# Altium PCB Power Divider.PcbDoc
Units mil, origin at the board's own origin, x right, y up, seen from the top; angles counter-clockwise.
Board outline 1900.95 x 2020.4 mil, 2 copper layers (Top Layer, Bottom Layer); 4 components, 0 nets, 17 pads, 0 vias.
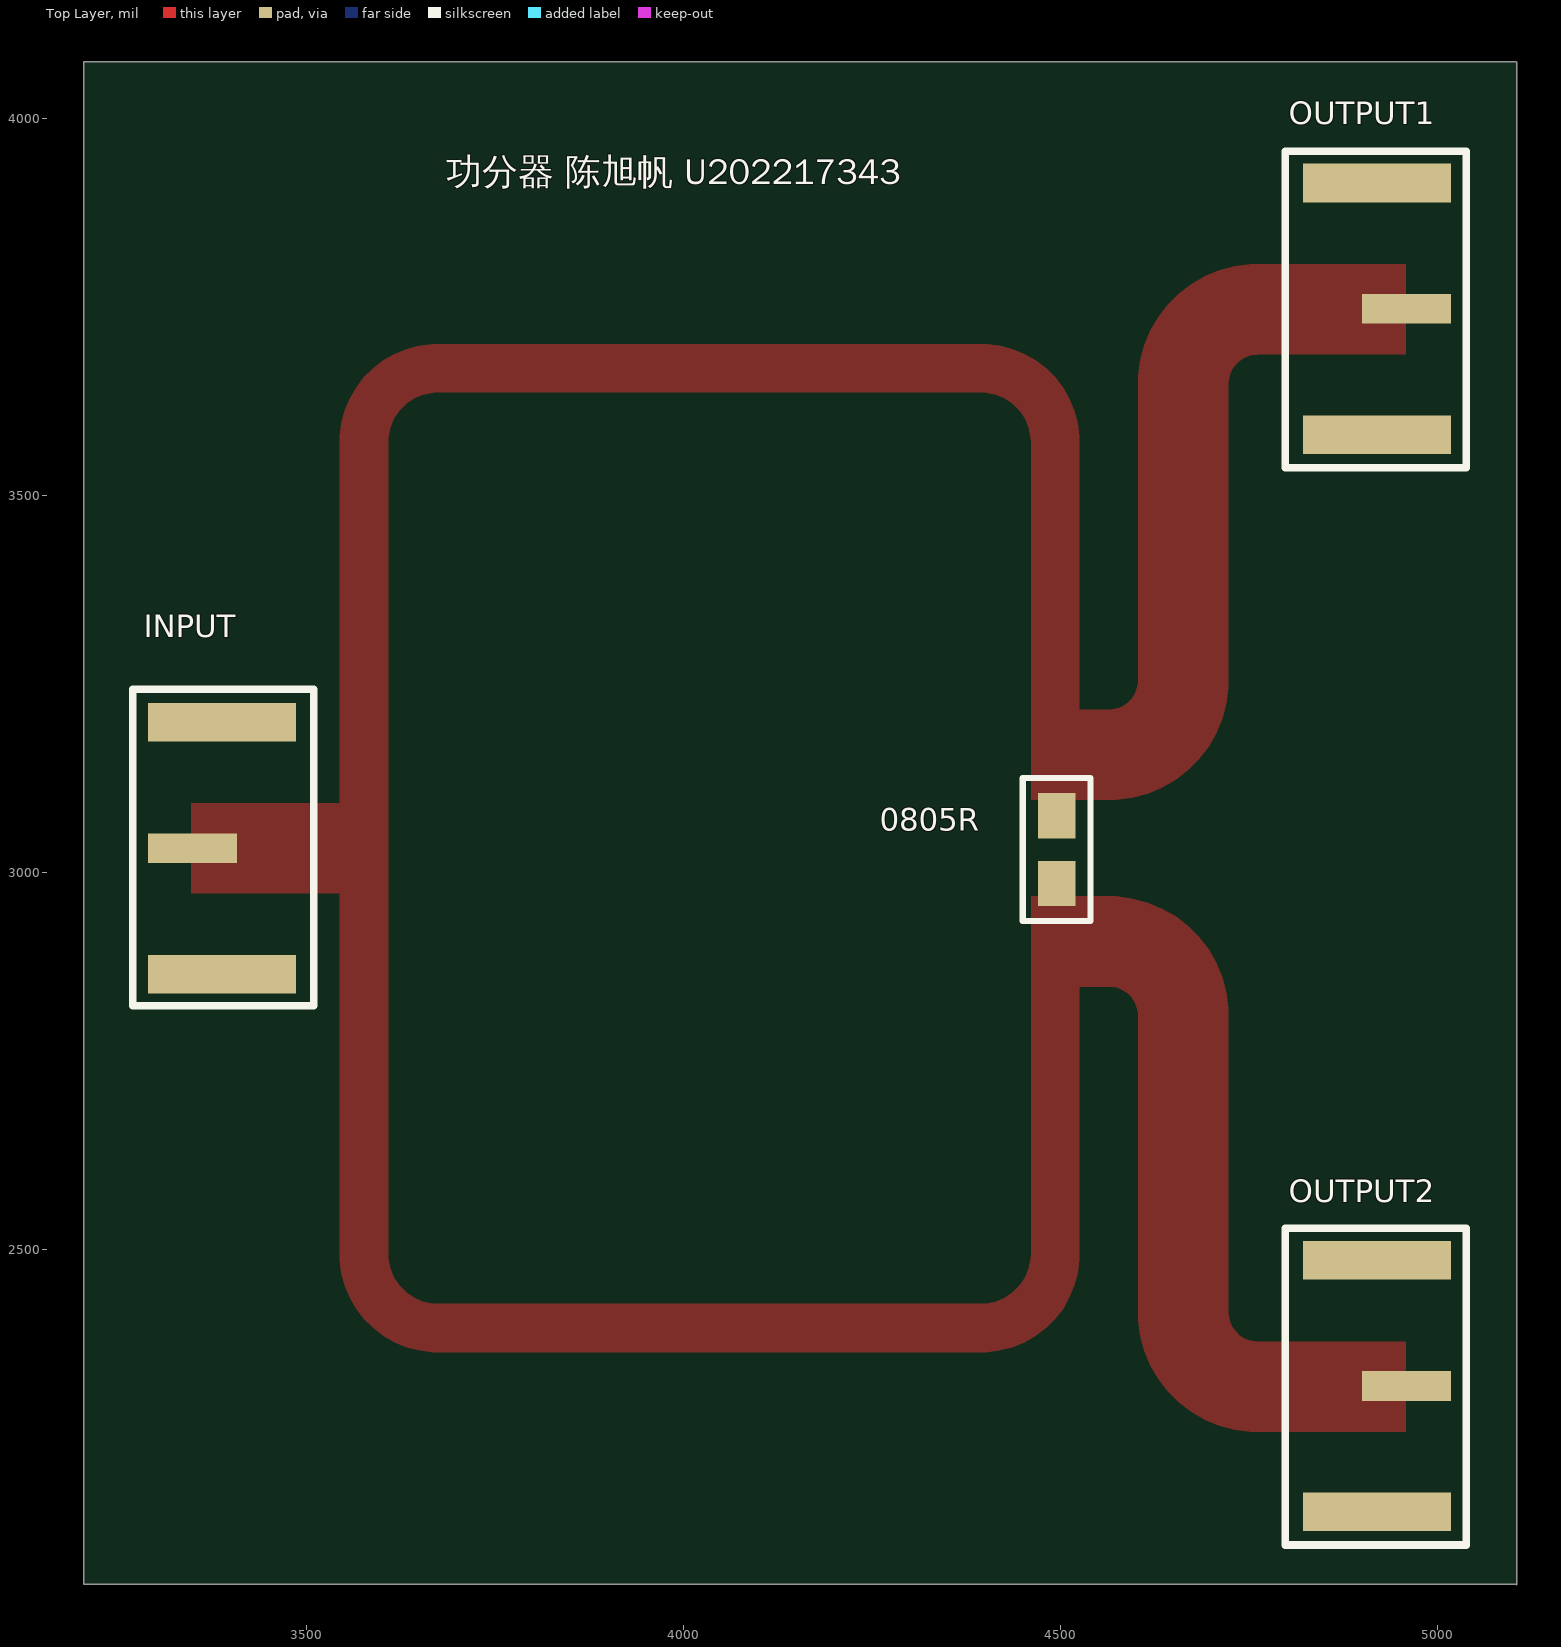
[diagram p0: Top Layer view]
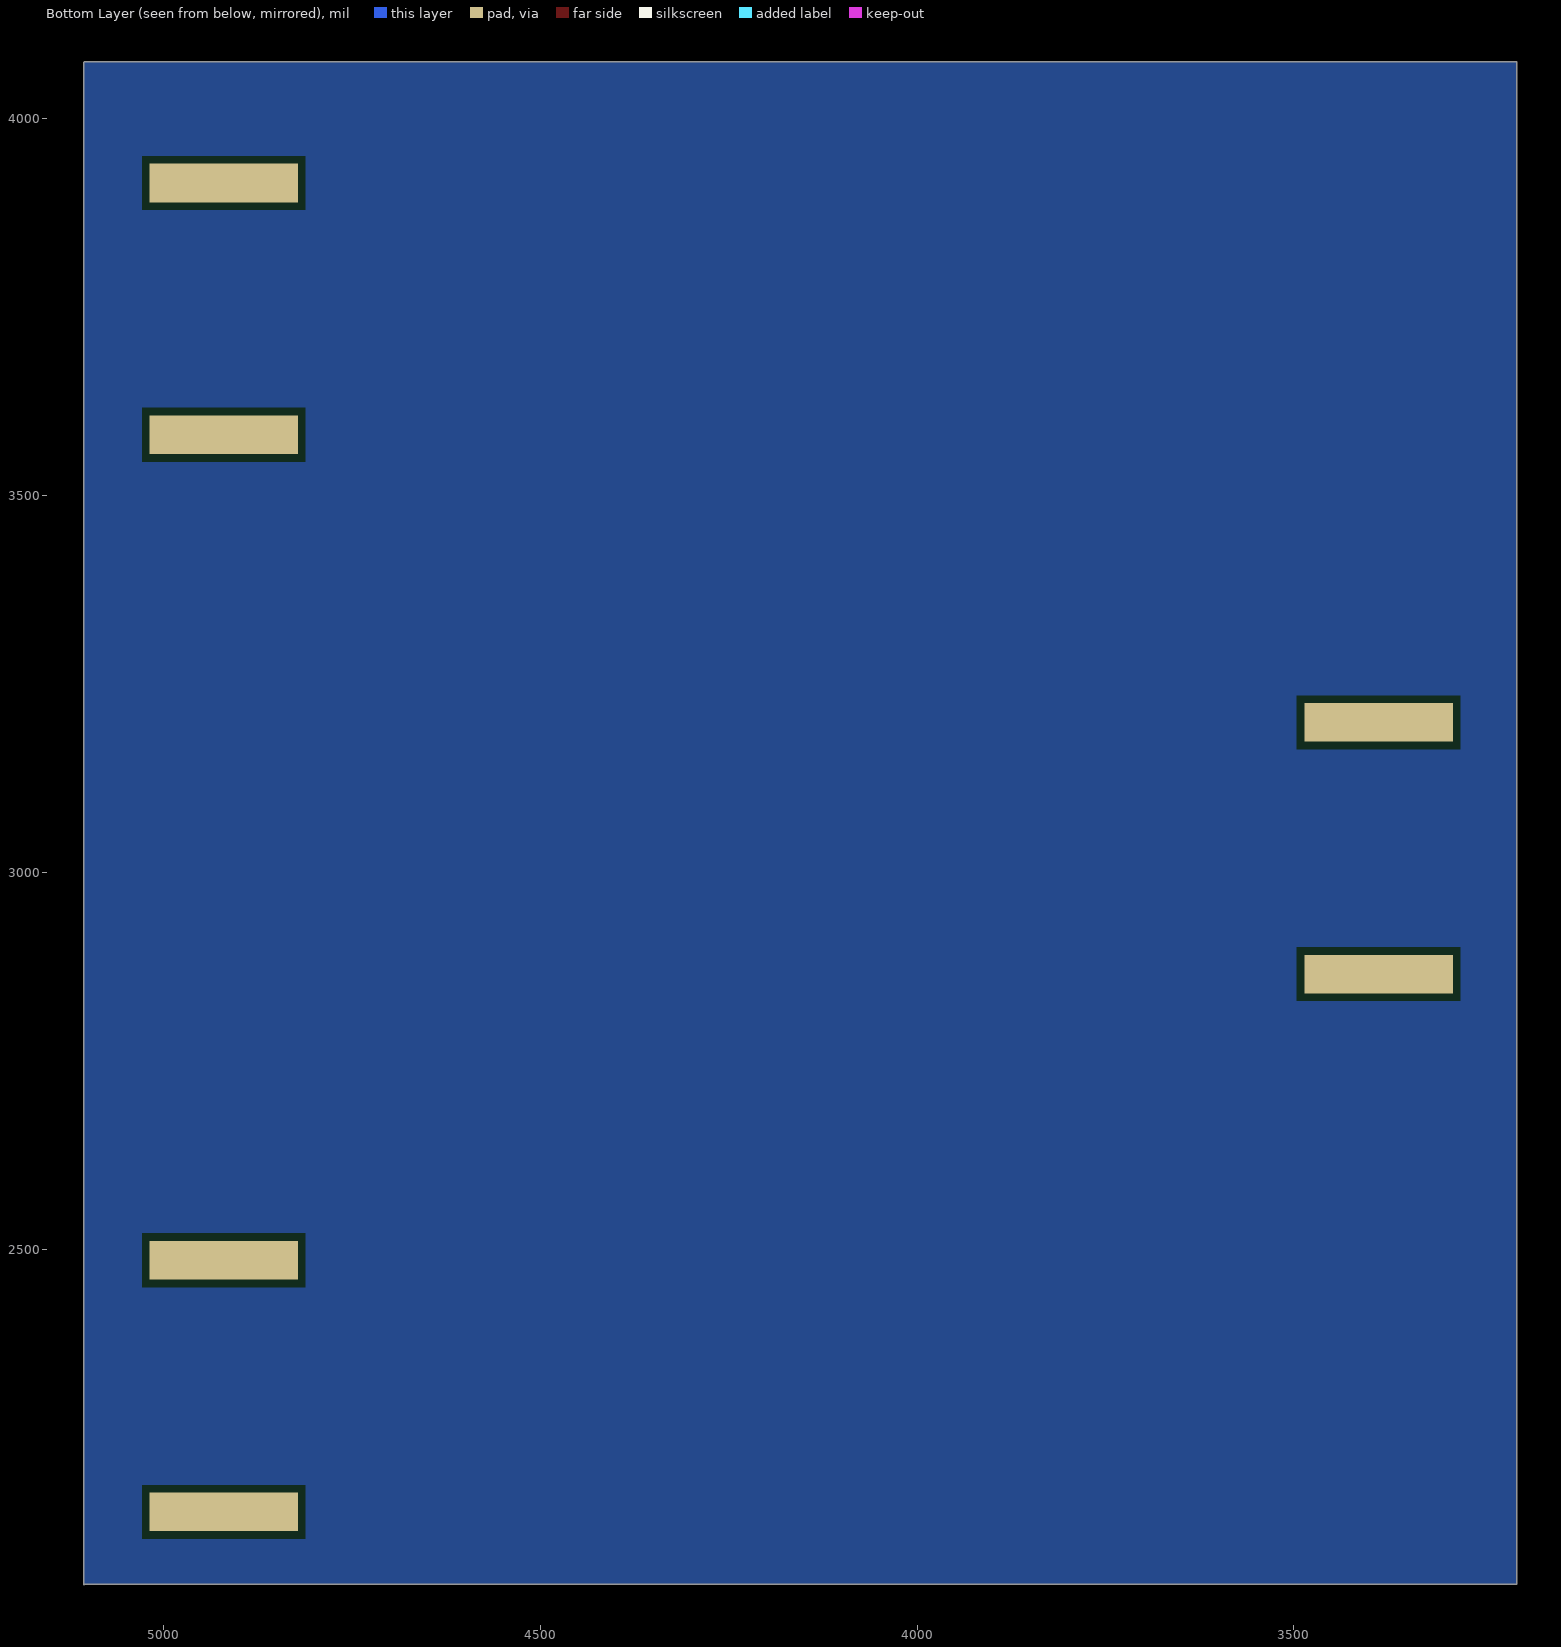
[diagram p1: Bottom Layer view, seen from below]

## Layer stack, top to bottom
Top Solder: solder mask 0.4, Solder Resist, Dk 3.5
Top Layer: signal copper 1.4
Dielectric 1: dielectric 12.6, FR-4, Dk 4.8
Bottom Layer: signal copper 1.4
Bottom Solder: solder mask 0.4, Solder Resist, Dk 3.5

## Board outline
3204.45,2055 3204.45,4075 5105,4075 5105.4,4074.6 5105.4,2054.6 5105,2055

## Design rules (kind name [scope] priority, off if disabled: settings)
Clearance [All] p1: gap=10 ignorepadtopadclearanceinfootprint=FALSE
PolygonConnect [All] p1: connectstyle=Direct reliefconductorwidth=10 reliefentries=4 polygonreliefangle="90 Angle" airgapwidth=10
RoutingVias [All] p1: holewidth=28 width=50 viastyle="Through Hole" minholewidth=28 minwidth=50 maxholewidth=28 maxwidth=50
SolderMaskExpansion [All] p1: expansion=4 istentingtop=FALSE
Width [All] p1: maxlimit=10 minlimit=10 preferedwidth=10
30 further rules are at their usual default settings.

## Components (designator, comment, footprint, x,y, rotation, side; value= is the part's Value field where it differs from the comment)
0805R "0805R" 0805R 4495,2985 r90 top
INPUT "PCBComponent_1" PCBComponent_1 3349.29,3032.65 r90 top
OUTPUT1 "PCBComponent_1" PCBComponent_1 4958.27,3746.54 r270 top
OUTPUT2 "PCBComponent_1" PCBComponent_1 4958.27,2317.4 r270 top

## Footprints (in the part's own frame and the unit in brackets; to place one, negate y for a bottom-side part, rotate by r counter-clockwise, add the part's x,y. Pads: shape width x height; smd on the part's side, far side on the other; paste and mask are expansions set on the pad)
0805R [mil]
  rect 60x50 smd: 1(0,0) 2(90,0)
  silkscreen extent -50,-45 140,45, body extent 5,-25 83,25, height 22
PCBComponent_1 [mm]
  rect 1x3 smd: 1(-0.022,0.026)
  rect 1.3x5 smd: 2(-4.262,-0.974) 3(4.218,-0.974)
  rect 1.3x5 smd far side: 4(4.218,-0.974) 5(-4.262,-0.974)
  silkscreen extent -5.33,-4.06 5.33,2.03

## Nets (pads, with @x,y where several pads share a name; then routed paths per layer and width w, separated by ;. In a path a pad name is that pad's centre, name@x,y a point inside that pad or via, vN(x,y) a via of type N, cw(c..) or ccw(c..) an arc to the next point about the centre after c; other vN are vias at no path point)
pads on no net: 0805R.1 0805R.2 INPUT.1 INPUT.2 INPUT.3 INPUT.4 INPUT.5 OUTPUT1.1 OUTPUT1.2 OUTPUT1.3 OUTPUT1.4 OUTPUT1.5 OUTPUT2.1 OUTPUT2.2 OUTPUT2.3 OUTPUT2.4 OUTPUT2.5

## Polygon pours and split planes (outlines as drawn)
no net on Top Layer "NONET_L01_P004" (solid, pour order 4): 3543.7,2493.78 ccw(c3674.21,2493.78) 3674.21,2363.27 4394.68,2363.27 ccw(c4394.69,2493.78) 4525.2,2493.78 4525.2,2848.11 4564.57,2848.11 cw(c4564.57,2809.53) 4603.15,2809.53 4603.15,2415.83 ccw(c4761.42,2415.83) 4761.42,2257.56 4958.27,2257.56 4958.27,2377.24 4761.42,2377.24 cw(c4761.42,2415.83) 4722.83,2415.83 4722.83,2809.53 ccw(c4564.57,2809.53) 4564.57,2967.8 4461.02,2967.8 4461.02,2493.78 cw(c4394.69,2493.78) 4394.69,2427.44 3674.21,2427.44 cw(c3674.21,2493.78) 3607.87,2493.78 3607.87,3570.16 cw(c3674.21,3570.16) 3674.21,3636.5 4394.69,3636.5 cw(c4394.69,3570.16) 4461.02,3570.16 4461.02,3096.14 4564.57,3096.14 ccw(c4564.57,3254.41) 4722.83,3254.41 4722.83,3648.11 cw(c4761.42,3648.11) 4761.42,3686.69 4958.27,3686.69 4958.27,3806.38 4761.42,3806.38 ccw(c4761.42,3648.11) 4603.15,3648.11 4603.15,3254.41 cw(c4564.57,3254.41) 4564.57,3215.83 4525.2,3215.83 4525.2,3570.16 ccw(c4394.69,3570.16) 4394.68,3700.67 3674.21,3700.67 ccw(c3674.21,3570.16) 3543.7,3570.16 3543.7,3091.81 3346.85,3091.81 3346.85,2972.13 3543.7,2972.13
no net on Bottom Layer "NONET_L02_P006" (solid, pour order 6): 3205,4075 5105,4075 5105,2055 3205,2055

## Silkscreen, mask and mechanical layers (free items; w line width, h text height)
Top Overlay:
  text "功分器 陈旭帆 U202217343" at 3685.06,3900.66 h60
Mechanical 1:
  the board outline again, w10